# Altium PCB PCB1.PcbDoc
Units mm, origin at the board's own origin, x right, y up, seen from the top; angles counter-clockwise.
Board outline 68.58 x 74.8 mm, 2 copper layers (Top Layer, Bottom Layer); 36 components, 27 nets, 122 pads, 6 vias.
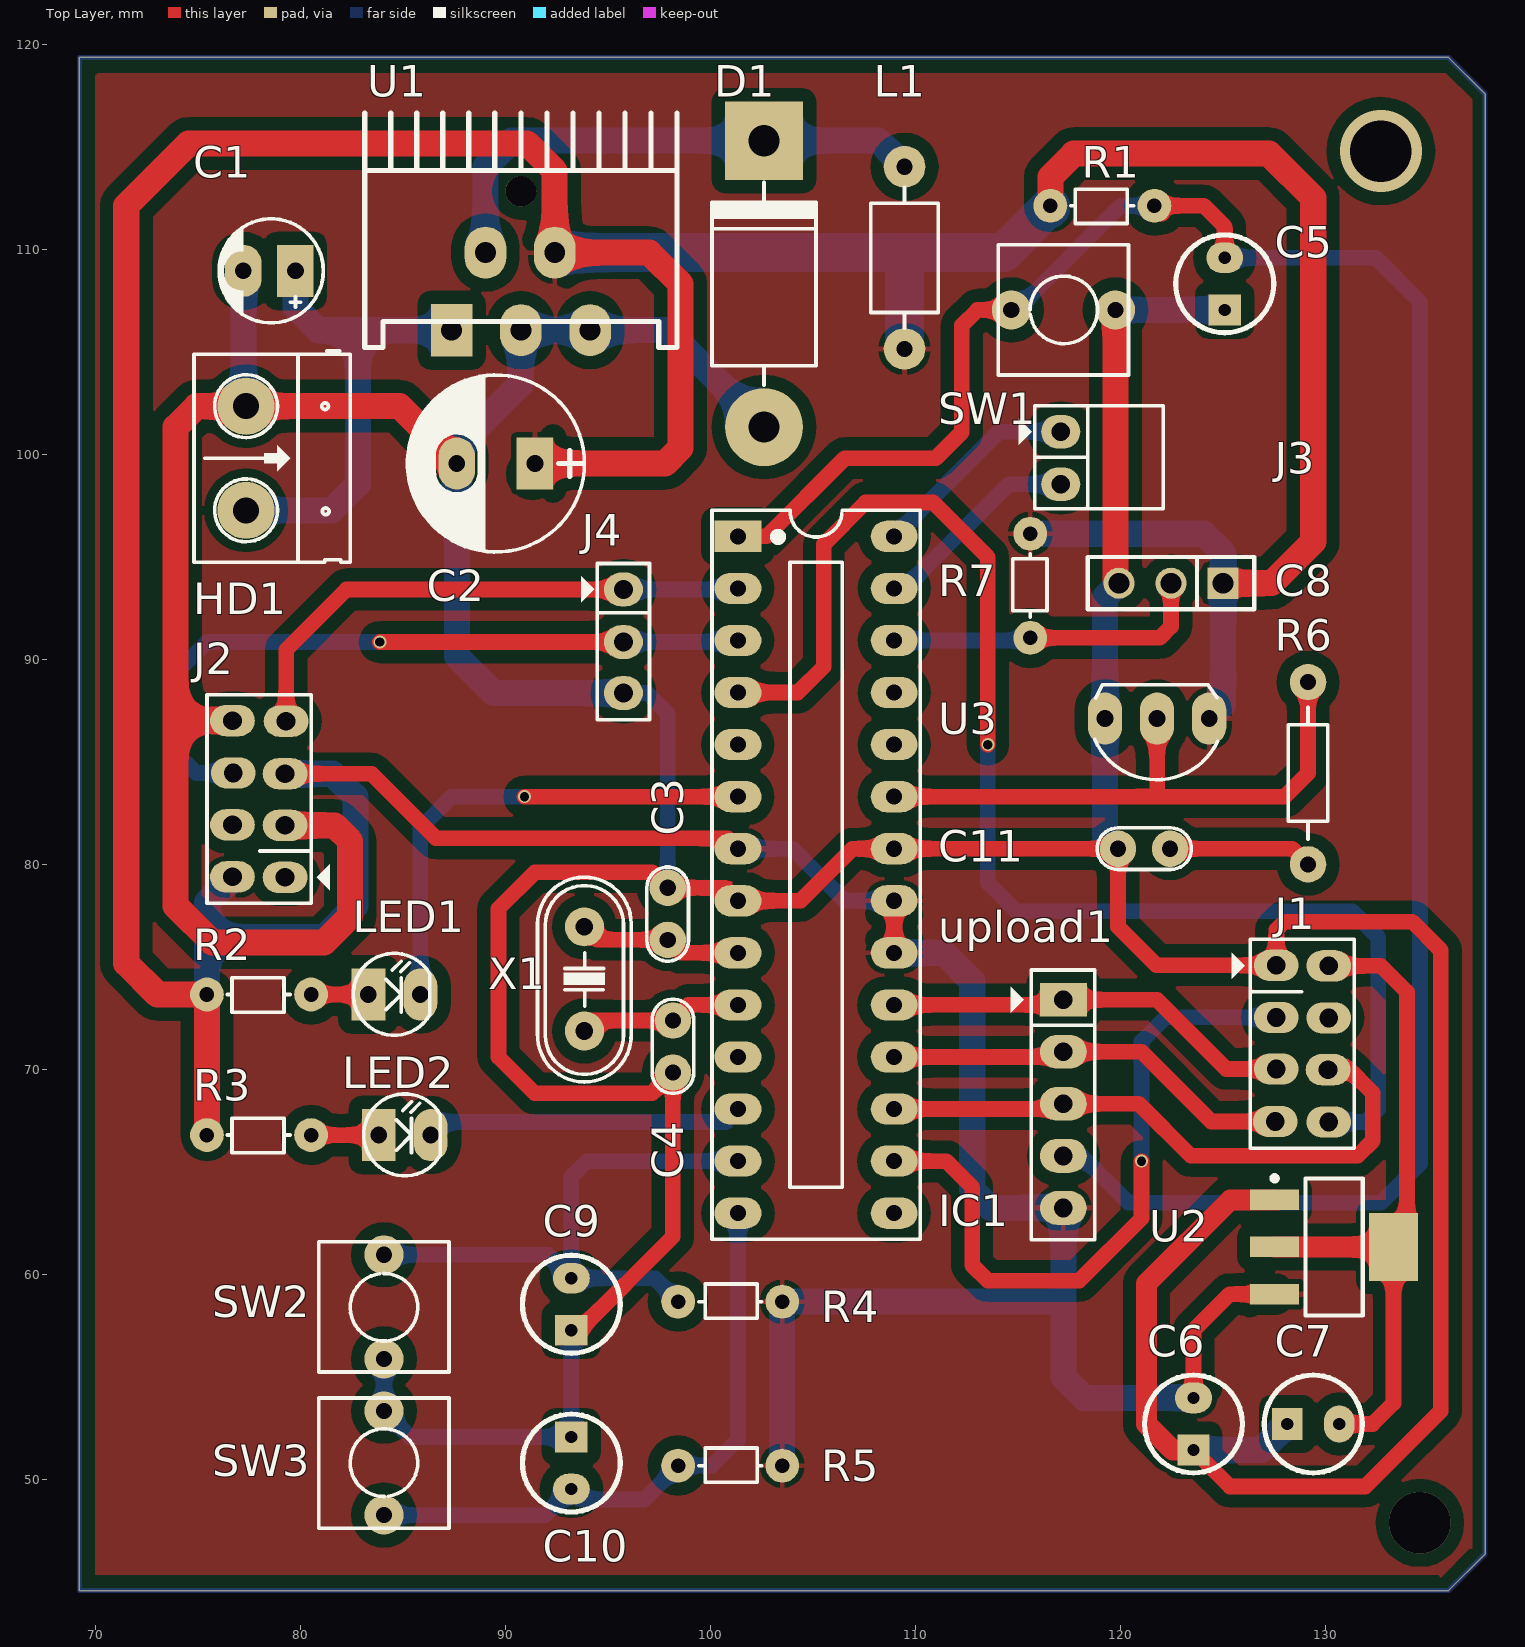
[diagram p0: Top Layer view]
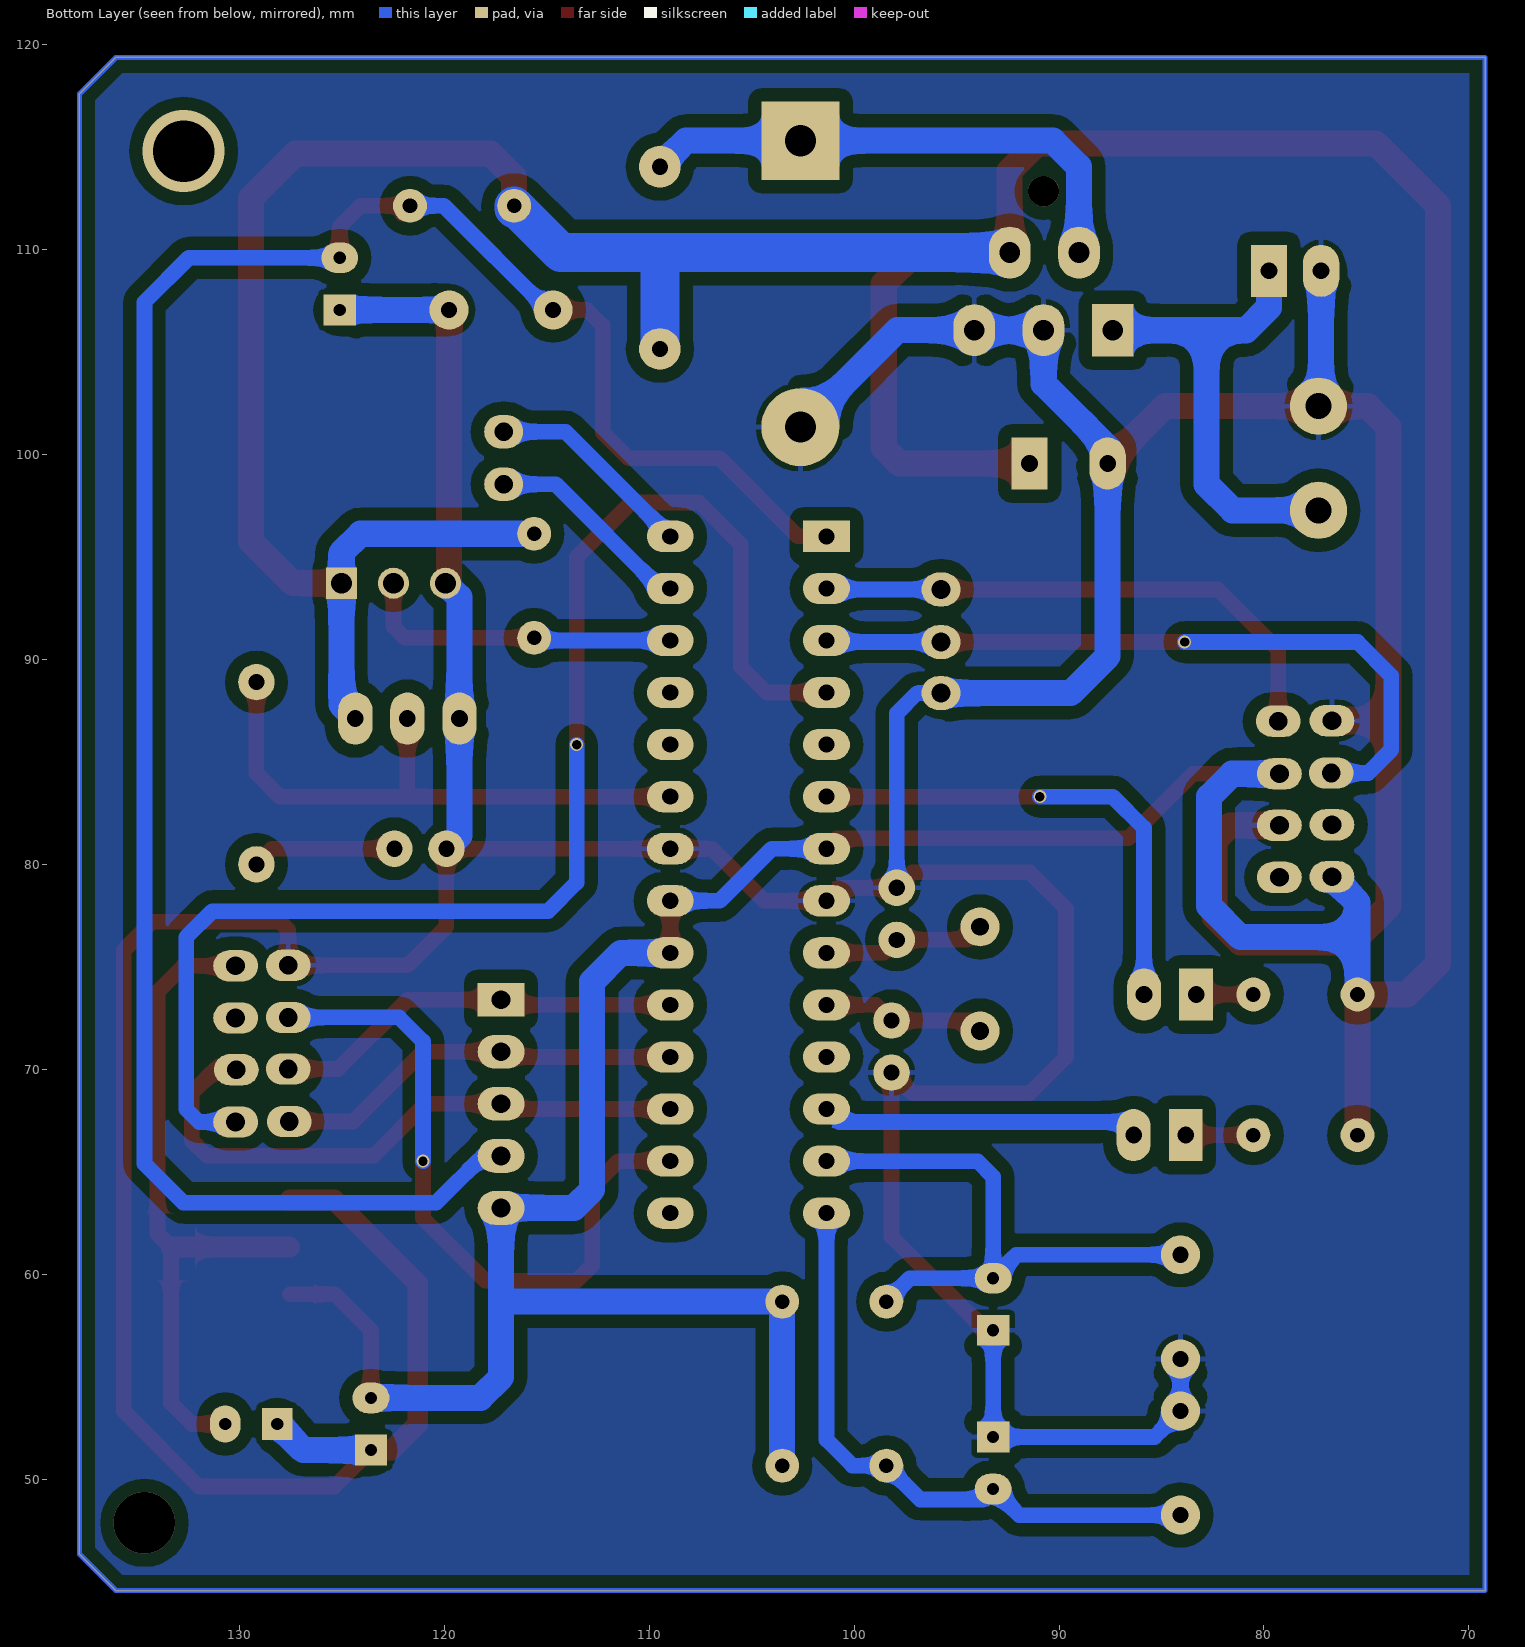
[diagram p1: Bottom Layer view, seen from below]
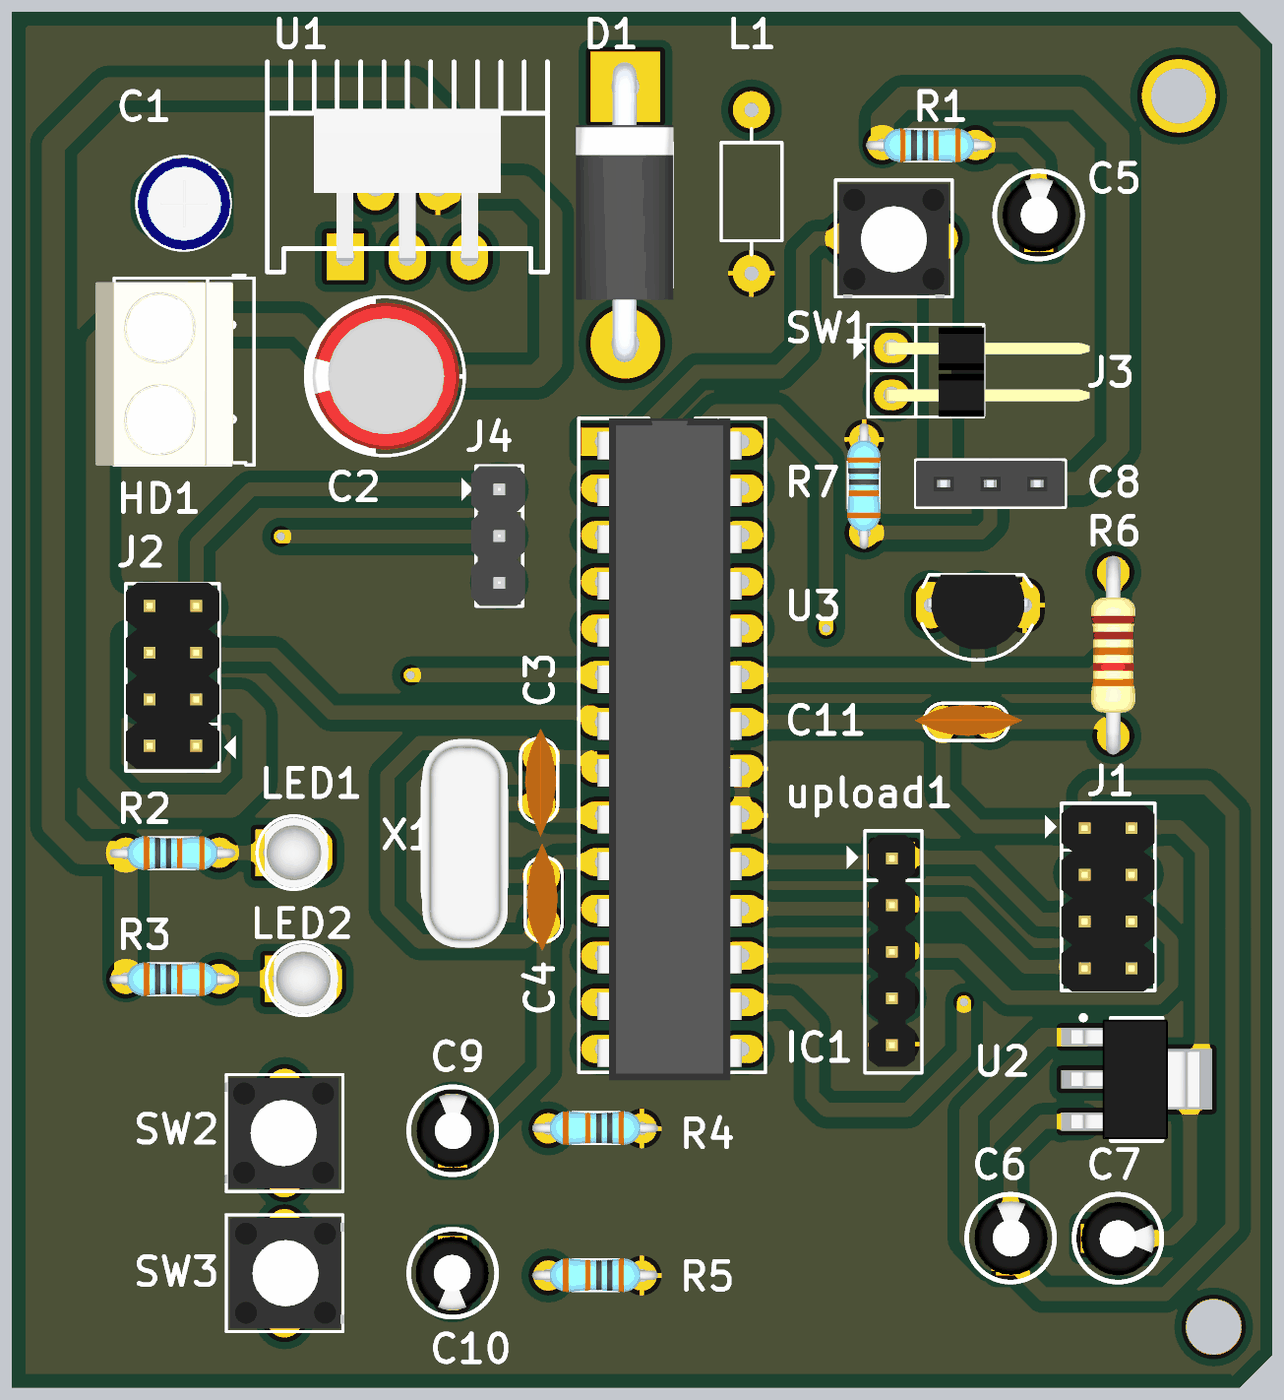
[diagram p2: 3D render of the assembled board from above, using the file's embedded part models]

## Layer stack, top to bottom
Top Solder: solder mask 0.0102, Solder Resist, Dk 3.5
Top Layer: signal copper 0.0356
Dielectric 1: dielectric 0.32, FR-4, Dk 4.8
Bottom Layer: signal copper 0.0356
Bottom Solder: solder mask 0.0102, Solder Resist, Dk 3.5

## Board outline
69.215,44.577 69.215,119.38 136.017,119.38 137.795,117.602 137.795,46.355 136.017,44.577

## Design rules (kind name [scope] priority, off if disabled: settings)
Clearance [All] p1: gap=0.635 ignorepadtopadclearanceinfootprint=FALSE
PlaneConnect [All] p1: planeconnectstyle=Relief reliefexpansion=0.508 reliefentries=4 reliefconductorwidth=0.254 reliefairgap=0.508
PolygonConnect [All] p1: connectstyle=Relief reliefconductorwidth=0.254 reliefentries=4 polygonreliefangle="90 Angle" airgapwidth=0.254
RoutingVias [All] p1: holewidth=0.635 width=0.762 viastyle="Through Hole" minholewidth=0.381 minwidth=0.508 maxholewidth=0.457 maxwidth=0.635
SolderMaskExpansion [All] p1: expansion=0.254
Width [All] p1: maxlimit=3.81 minlimit=0.508 preferedwidth=0.762
29 further rules are at their usual default settings.

## Components (designator, comment, footprint, x,y, rotation, side; value= is the part's Value field where it differs from the comment)
C1 "10uF" CP1/2 79.756,108.966 r180 top value=10uF/50V
C2 "1000uF/16V" CP1.5/3.4 91.44,99.568 r180 top
C3 "100pF" CN1 97.917,78.867 r270 top
C4 "100pF" CN1 98.171,69.85 r90 top
C5 "Cap" C3MM 125.095,108.331 r90 top value=0.1uF
C6 "Cap" C3MM 123.571,52.705 r90 top value=0.1uF
C7 "Cap" C3MM 129.413,52.705 r0 top value=0.1uF
C8 "JP3" JP3-C1T 125.013,93.726 r180 top
C9 "Cap" C3MM 93.218,58.547 r90 top value=0.1uF
C10 "Cap" C3MM 93.218,50.8 r270 top value=0.1uF
C11 "100pF" CN1 119.888,80.772 r0 top
D1 "1N5822" D5A 102.616,115.316 r270 top value="Diode c?m 1N5408"
HD1 "Header 2" HED2 77.343,102.362 r270 top
IC1 "ATmega8-L" DIP28/W0.3 101.346,96.012 r270 top
J1 "Connector 4x2" JP4x2 128.867,71.26 r270 top
J2 "Connector 4x2" JP4x2 77.991,83.198 r90 top
J3 "Jumper 2" jp2h 117.094,101.117 r270 top value="JP 2"
J4 "Jumper 3" JP3 95.758,90.881 r270 top value=J3
L1 "100mH" L/0.4 109.474,114.046 r270 top value="150 mH"
LED1 "LED" LED-3 83.312,73.66 r0 top value="LED 3 ly Single Colour"
LED2 "LED" LED-3 83.82,66.802 r0 top value="LED 3 ly Single Colour"
R1 "10k" R1/8W 119.126,112.141 r180 top value="R1/4W - 1K"
R2 "10k" R1/8W 77.978,73.66 r180 top value="R1/4W - 1K"
R3 "10k" R1/8W 77.978,66.802 r180 top value="R1/4W - 1K"
R4 "10k" R1/8W 100.965,58.674 r0 top value="R1/4W - 1K"
R5 "10k" R1/8W 100.965,50.673 r0 top value="R1/4W - 1K"
R6 "1k" R1/4W 129.159,80.01 r90 top value="R1/4W - 1K"
R7 "4.7k" R1/8W 115.608,93.599 r90 top value="R1/4W - 1K"
SW1 "SW" SW2 119.761,107.061 r180 top value="SW chip 2 pin"
SW2 "SW" SW2 84.074,55.88 r90 top value="SW chip 2 pin"
SW3 "SW" SW2 84.074,53.34 r270 top value="SW chip 2 pin"
U1 "LM2576T-5.0" LM2576t 90.729,110.312 r0 top
U2 "AMS1117" SOT223 130.429,61.341 r270 top
U3 "LM35" QTO-92 121.793,87.122 r180 top
upload1 "JP5" JP5 117.221,73.406 r270 top
X1 "4Mhz" XT2 93.853,74.422 r90 top

## Footprints (in the part's own frame and the unit in brackets; to place one, negate y for a bottom-side part, rotate by r counter-clockwise, add the part's x,y. Pads: shape width x height; smd on the part's side, far side on the other; paste and mask are expansions set on the pad)
C3MM [mm]
  rect 1.5x1.58 hole 0.6: 1(-1.27,0)
  oval 1.5x1.8 hole 0.6: 2(1.27,0)
  silkscreen extent -2.39,-2.39 2.39,2.39, body extent -2,-2.03 1.99,1.97, height 7.01
CN1 [mil]
  round 70 hole 31: 1(0,0) 2(100,0)
  silkscreen extent -40,-40 141,40, body extent -60,-30 170,37, height 265
CP1.5/3.4 [mil] "Tu hoa 220->470uF,16V, 470uF/16V,25V"
  rect 70x100 hole 32: 1(0,0)
  oval 70x100 hole 32: 2(150,0)
  silkscreen extent -95,-170 245,170, body extent -85,-157 230,157, height 446
CP1/2 [mil] "Tu hoa < 22uF/16>50V"
  rect 70x100 hole 32: 1(0,0)
  oval 70x100 hole 32: 2(100,0)
  silkscreen extent -53,-100 147,100, body extent -54,-99 144,100, height 296
D5A [mil] "Diode 5A, W 200mil, L 550mil"
  round 150 hole 60: 1(550,0)
  rect 150x150 hole 60: 2(0,0)
  silkscreen extent 80,-100 470,100, body extent -52,-106 590,103, height 254
DIP28/W0.3 [mil] "28 PIN, W 300mil, Pin to pin 100mil"
  rect 60x90 hole 31: 1(0,0)
  oval 60x90 hole 31: 2(100,0) 3(200,0) 4(300,0) 5(400,0) 6(500,0) 7(600,0) 8(700,0) 9(800,0) 10(900,0) 11(1000,0) 12(1100,0) 13(1200,0) 14(1300,0) 15(1300,300) 16(1200,300) 17(1100,300) 18(1000,300) 19(900,300) 20(800,300) 21(700,300) 22(600,300) 23(500,300) 24(400,300) 25(300,300) 26(200,300) 27(100,300) 28(0,300)
  silkscreen extent -50,-50 1350,350, body extent -50,-10 1367,300, height 200
HED2 [mil] "Header 2, 2 pin, hight 300mil, Pin to Pin 200, Colour Green"
  round 110 hole 50: 1(0,0) 2(200,0)
  silkscreen extent -106,-100 300,200, body extent -92,-140 302,155, height 394
jp2h [mil]
  oval 65x75 hole 36: 1(0,0) 2(101,0)
  silkscreen extent -50,-81 148,197, body extent -44,-14 148,424, height 99
JP3 [mil] "Jumper 3"
  oval 65x75 hole 36: 1(-100,0) 2(1,0) 3(99,0)
  silkscreen extent -150,-81 150,50, body extent -150,-60 150,55, height 355
JP3-C1T [mm] "3 row, straight, gold plating"
  rect 1.52x1.52 hole 1.02: 1(0,0)
  round 1.52 hole 1.02: 2(2.54,0) 3(5.08,0)
  silkscreen extent -1.52,-1.27 6.6,1.27, body extent -1.52,-1.25 6.6,1.25, height 8.51
JP4x2 [mil] "Connector 4x2"
  oval 60x86 hole 36: 1(-150.5,-49.5) 2(-50.5,-49.5) 3(48.5,-49.5) 4(149.5,-51.5) 5(-149.5,51.5) 6(-49.5,51.5) 7(50,50) 8(150.5,51.5)
  silkscreen extent -201,-135 201,101, body extent -197,-100 203,100, height 335
JP5 [mil] "JP5"
  rect 65x90 hole 36: 1(0,0)
  oval 65x90 hole 36: 2(100,0) 3(200,0) 4(300,0) 5(400,0)
  silkscreen extent -57,-101 461,60, body extent -48,-53 448,45, height 323
L/0.4 [mil] "Inductor , 2 Pin, L 350mil, W 150 mil"
  round 80 hole 31: 1(0,0) 2(350,0)
  silkscreen extent 40,-65 310,65
LED-3 [mil] "LED 2 PIN, 3ly Only colour"
  rect 65x100 hole 32: 1(0,0)
  oval 65x100 hole 32: 2(100,0)
  silkscreen extent -29,-78 118,79, body extent -13,-75 125,75, height 217
LM2576t [mil]
  rect 80x100 hole 40: 1(-132,-167.09)
  oval 80x100 hole 40: 2(-67,-18) 3(1,-167) 4(66,-18) 5(134,-167)
  round 59.06 hole 59.06: ""(1,100)
  silkscreen extent -299,-200 301,250, body extent -199,-175 201,150, height 859
QTO-92 [mil] "TO-92"
  oval 66x100 hole 32: 1(-100,0) 2(0,0) 3(100,0)
  silkscreen extent -117,-65 120,118, body extent -109,-66 109,95, height 245
R1/4W [mil] "R 1/4W, 2 Pin, 350mil"
  round 70 hole 31: 1(0,0) 2(350,0)
  silkscreen extent 48,-38 302,38, body extent -40,-47 386,47, height 111
R1/8W [mil] "R 1/8W, 2 pin, 300mil"
  round 65 hole 28: 1(-100,0) 2(100,0)
  silkscreen extent -60,-32 61,34, body extent -135,-35 135,37, height 86
SOT223 [mm]
  rect 1x2.4 smd: 1(-2.3,-2.9) 2(0,-2.9) 3(2.3,-2.9)
  rect 3.3x2.4 smd: 4(0,2.9)
  silkscreen extent -3.47,-3.02 3.35,1.4, body extent -3.25,-3.56 3.25,3.4, height 1.68
SW2 [mil] "SW button 2pin, 250x 250 mil"
  round 75 hole 31: 1(0,0) 2(200,0)
  silkscreen extent -25,-125 225,125, body extent -18,-116 218,128, height 197
XT2 [mil] "Footpin for Crystal 2 pin"
  round 75 hole 34: 1(-100,0) 2(100,0)
  silkscreen extent -198,-90 195,90, body extent -233,-93 213,90, height 138

## Part data
C1: library part CP0, "Cap P  0,1uF < 22uF , 16 - 50V", Description 1="10 => 220uF/6,3V/10V - 10uF => 100uF/16V", Description 2="0,1uF => 33uF/50V - 10uF => 22uF/63V", Description 3="0,47uF => 10uF/100V"
C2: library part CP4, "Cap 1000uF/16V - 220uF/50V", Description 1="2200uF-3300uF/6,3V - 1000uF-2200uF/10V", Description 2="1000uF/16V - 470uF => 1000uF/25V - 100uF/100V", Description 3=330uF>470uF/35V_220uF>470uF/50V_10uF>22uF/250V, Description 4="220uF => 330uF/63V - 10uF =>33uF/160 - 200V", Description 5="4,7uF>10uF/250V_3,3uF>10uF/400V - 2,2uF>4,7uF/450V"
C3 C4 C11: library part CN1, "Cap np  1pF - 472pF"
C5 C6 C7 C9 C10: "Capacitor", LatestRevisionDate=17-Jul-2002, LatestRevisionNote="Re-released for DXP Platform.", PackageReference=RAD-0.3, Published=8-Jun-2000, Publisher="Altium Limited"
C8: "WR-PHD 2.54 mm Angled Socket Header", Manufacturer="Würth Elektronik eiSos GmbH", partNo=613003143121, ComponentLink1 Description=Manufacturer, ComponentLink1URL=http://www.we-online.com, ComponentLink2 Description=Datasheet, ComponentLink2URL=http://katalog.we-online.de/em/datasheet/6130xx143121.pdf, Created by="Karrer Zheng", Created Date="29 March 2013", NoPins=03
D1: "Schottky Rectifiers"
HD1: library part Hed2, "Header 2 (Green)"
IC1: "8-Bit AVR Microcontroller with 8K Bytes of In-System Programmable Flash Memory"
J1 J2: library part JP4x2
J3: library part "JP 2"
J4: library part JP3
L1: library part L1, "Inductor"
LED1 LED2: "LED Single colour Green and Red"
R1 R2 R3 R4 R5 R7: library part R, "Resistor 1/4W"
R6: library part R1/4W, "Resistor 1/4W"
SW1 SW2 SW3: library part SW2, "Switch button 2 pin"
U1: "SIMPLE SWITCHER; 3A Step-Down Voltage Regulator", DigiKeyPartNumber=LM2576T-5.0-ND, Manufacturer="National Semiconductor", PackageTopMarking="NSUZXYTT*LM2576T*-5.0 P+", PowerWise=N, Code_JEDEC=TO-220-AB, ComponentLink1Description="LM2576 Datasheet", ComponentLink1URL=http://www.national.com/ds/LM/LM2576.pdf, ComponentLink2Description="LM2576 Web Page", ComponentLink2URL=http://www.national.com/pf/LM/LM2576.html, ComponentLink3Description="T05A Package Page", ComponentLink3URL=http://www.national.com/packaging/folders/t05a.html, CompType=Switcher, DatasheetVersion=Aug-2004, FirstPublished=4-Dec-2008, PackageDescription="TO-220, Molded, 5 Lead, Straight", PackageReference=T05A, PackageVersion="revJ, Jan-1992", PartNumber=LM2576T-5.0, PinCount=5, Publisher="Altium Limited", RoHS=O
U2: library part AMS117
U3: "Teminal"
X1: library part XT2, "Crystal For all Crystal 2pin."

## Via types
v1: diameter 0.635, hole 0.457, Top Layer to Bottom Layer, 4 vias
v2: diameter 4, hole 3, Top Layer to Bottom Layer, 1 vias
v3: diameter 3, hole 3, Top Layer to Bottom Layer, 1 vias

## Nets (pads, with @x,y where several pads share a name; then routed paths per layer and width w, separated by ;. In a path a pad name is that pad's centre, name@x,y a point inside that pad or via, vN(x,y) a via of type N, cw(c..) or ccw(c..) an arc to the next point about the centre after c; other vN are vias at no path point)
3v3: C7.2 J1.5 U2.2 U2.4 | length 33.5
  Top Layer w0.762: J1.5 132.715,75.057 133.985,73.787 133.985,61.997 U2.4 133.329,53.725 132.309,52.705 C7.2
  Top Layer w1.016: U2.2 U2.4
5v: C2.1 C6.2 C8.1 IC1.7 IC1.20 IC1.21 J2.3 J2.5 L1.2 R1.2 R2.2 R3.2 R4.2 R5.2 R7.2 U1.4 U2.3 U3.1 upload1.5 | length 305.8
  Top Layer w0.762: J2.3 83.464,84.43 86.614,81.28 100.838,81.28 IC1.7 ; IC1.20 IC1.21 ; C6.2 123.571,57.277 125.335,59.041 U2.3
  Top Layer w1.27: R3.2 R2.2 73.025,73.66 71.501,75.184 71.501,112.141 74.549,115.189 91.059,115.189 92.405,113.843 U1.4 97.028,109.855 98.552,108.331 98.552,100.33 97.79,99.568 91.821,99.568 C2.1@91.313,99.06 ; R1.2 116.586,113.538 117.729,114.681 127.254,114.681 129.413,112.522 129.413,95.758 127.381,93.726 C8.1
  Bottom Layer w0.762: IC1.7 104.013,80.772 106.553,78.232 IC1.21
  Bottom Layer w1.27: R2.2 75.438,76.454 ; J2.5 75.438,78.156 75.438,76.454 ; J2.3 81.559,84.43 82.677,83.312 82.677,77.978 81.153,76.454 75.438,76.454 ; R5.2 R4.2 116.967,58.674 117.221,58.928 ; IC1.20 111.379,75.692 112.776,74.295 112.776,64.135 113.665,63.246 upload1.5 117.221,58.928 ; R7.2 124.079,96.139 125.013,95.205 C8.1 125.013,87.802 U3.1 ; C6.2 118.237,53.975 117.221,54.991 117.221,58.928
  Bottom Layer w1.905: U1.4 109.347,109.855 ; L1.2 109.474,109.728 109.347,109.855 ; R1.2@116.586,112.014 R1.2 114.3,109.855 109.347,109.855
CE: IC1.16 J1.2 | length 33.7
  Top Layer w0.762: IC1.16 111.506,65.532 112.776,64.262 112.776,60.452 113.538,59.69 117.983,59.69 121.031,62.738 v1(121.031,65.532)
  Bottom Layer w0.762: v1(121.031,65.532) 121.031,71.374 122.199,72.542 J1.2
CSN: J1.6
DATA_11: C8.2 IC1.26 R7.1 | length 16.1
  Top Layer w0.762: IC1.26 IC1.26@109.093,91.059 ; R7.1 121.92,91.059 122.473,91.612 C8.2
  Bottom Layer w0.762: IC1.26 115.481,90.932 R7.1
GND: C1.2 C2.2 C3.1 C4.1 C5.1 C6.1 C7.1 C8.3 C9.1 C10.1 C11.1 D1.1 HD1.1 IC1.8 IC1.22 J1.1 J2.2 J2.8 J4.3 SW1.1 SW2.1 SW3.1 U1.3 U1.5 U2.1 U3.3 | length 312.8
  Top Layer w0.762: C9.1 93.599,57.277 98.171,61.849 C4.1 97.155,68.834 91.44,68.834 89.662,70.612 89.662,77.851 91.44,79.629 97.155,79.629 C3.1 100.711,78.867 IC1.8 104.394,78.232 106.934,80.772 IC1.22 C11.1 119.888,76.962 121.768,75.082 J1.1 127.61,76.81 128.016,77.216 134.239,77.216 135.636,75.819 135.636,53.34 131.953,49.657 125.349,49.657 C6.1 ; U2.1 U2.1@127.67,63.5
  Top Layer w1.016: C6.1 122.555,51.435 121.285,52.705 121.285,59.563 125.363,63.641 U2.1
  Top Layer w1.27: J2.8 73.914,87.02 ; J2.2 81.661,81.915 82.423,81.153 82.423,77.47 81.153,76.2 75.692,76.2 73.914,77.978 73.914,87.02 ; C2.2 84.836,102.362 HD1.1 74.93,102.362 73.914,101.346 73.914,87.02 ; SW1.1 119.761,93.898 C8.3
  Bottom Layer w0.762: SW2.1 SW3.1 85.344,52.07 C10.1 C9.1 ; J4.3 96.926,88.367 97.917,87.376 C3.1 ; C8.3@119.761,93.898 C8.3
  Bottom Layer w1.27: C1.2 77.216,102.489 HD1.1 ; C2.2@87.503,99.568 87.503,100.203 90.754,103.454 U1.3 U1.5 97.892,106.07 D1.1 ; C2.2 87.63,90.17 89.433,88.367 J4.3 ; SW1.1 C5.1 ; C11.1 119.253,81.407 U3.3 119.253,93.046 C8.3 ; C6.1 126.873,51.435 C7.1
IRQ: IC1.4 J1.8 | length 67.7
  Top Layer w0.762: IC1.4 104.267,88.392 105.537,89.662 105.537,95.631 107.569,97.663 110.871,97.663 113.538,94.996 v1(113.538,85.852)
  Bottom Layer w0.762: v1(113.538,85.852) 113.538,79.121 114.935,77.724 131.318,77.724 132.588,76.454 132.588,68.072 131.953,67.437 J1.8
LED1: IC1.6 LED1.2 | length 24.3
  Top Layer w0.762: v1(90.932,83.312) IC1.6
  Bottom Layer w0.762: LED1.2 85.852,81.788 87.376,83.312 v1(90.932,83.312)
LED2: IC1.12 LED2.2 | length 15.5
  Bottom Layer w0.762: LED2.2 86.995,67.437 100.711,67.437 IC1.12
LM35: IC1.23 R6.2 U3.2 | length 29
  Top Layer w0.762: IC1.23 121.666,83.312 ; U3.2 121.793,83.439 121.666,83.312 ; R6.2 129.159,84.455 128.016,83.312 121.666,83.312
MISO: IC1.18 J1.4 upload1.2 | length 20.1
  Top Layer w0.762: IC1.18 116.967,70.612 upload1.2 121.031,70.866 124.435,67.462 J1.4
MOSI: IC1.17 J1.7 upload1.3 | length 29.8
  Top Layer w0.762: IC1.17 116.967,68.072 upload1.3 120.904,68.326 123.444,65.786 131.572,65.786 132.313,66.527 132.313,68.855 131.178,69.99 J1.7
NetC1_1: C1.1 HD1.2 U1.1 | length 23.4
  Bottom Layer w1.27: HD1.2 81.534,97.282 82.804,98.552 82.804,106.068 ; C1.1 79.756,107.188 80.876,106.068 82.804,106.068 ; U1.1@87.353,106.045 U1.1 82.804,106.068
NetC3_2: C3.2 IC1.9 X1.2 | length 8
  Top Layer w0.762: X1.2 94.488,76.327 C3.2 98.552,75.692 IC1.9
NetC4_2: C4.2 IC1.10 X1.1 | length 8
  Top Layer w0.762: X1.1 94.361,72.39 C4.2 98.933,73.152 IC1.10
NetC5_2: C5.2 IC1.1 R1.1 SW1.2 upload1.4 | length 107.6
  Top Layer w0.762: IC1.1 102.743,96.012 106.553,99.822 110.998,99.822 112.268,101.092 112.268,106.299 113.03,107.061 SW1.2 ; R1.1@122.047,111.76 R1.1 124.079,112.141 125.095,111.125 C5.2
  Bottom Layer w0.762: SW1.2 114.935,107.061 120.015,112.141 R1.1 ; upload1.4 118.11,65.786 120.396,63.5 132.715,63.5 134.62,65.405 134.62,107.442 132.461,109.601 C5.2
NetC11_2: C11.2 R6.1 | length 7
  Top Layer w0.762: C11.2 128.397,80.772 R6.1
NetD1_2: D1.2 L1.1 U1.2 | length 25.7
  Bottom Layer w1.27: U1.2 89.027,114.046 90.297,115.316 D1.2 108.204,115.316 L1.1
NetLED1_1: LED1.1 R2.1 | length 3
  Top Layer w0.762: R2.1 LED1.1@83.185,73.66 ; LED1.1 LED1.1@83.185,73.66 ; LED1.1@83.312,73.787 LED1.1@83.185,73.66
NetLED2_1: LED2.1 R3.1 | length 3.5
  Top Layer w0.762: R3.1 LED2.1@83.693,66.802 ; LED2.1@83.82,66.675 LED2.1@83.693,66.802 ; LED2.1 LED2.1@83.693,66.802
PB0: C10.2 IC1.14 R5.1 SW3.2 | length 30.3
  Bottom Layer w0.762: SW3.2 91.948,48.26 C10.2 93.726,49.022 96.774,49.022 R5.1 100.076,50.673 101.346,51.943 IC1.14
PD7: C9.2 IC1.13 R4.1 SW2.2 | length 28.7
  Bottom Layer w0.762: SW2.2 92.075,60.96 C9.2 ; R4.1 97.282,59.817 C9.2 ; IC1.13 93.98,65.532 93.218,64.77 C9.2
RF433_rx: IC1.2 J2.4 J4.1 | length 26.9
  Top Layer w0.762: J2.4 79.299,90.475 82.245,93.421 J4.1 J4.1@95.733,93.447 ; IC1.2@101.244,93.37 IC1.2
  Bottom Layer w0.762: J4.1 101.295,93.421 IC1.2
RF433_tx: IC1.3 J2.7 J4.2 | length 35.5
  Top Layer w0.762: v1(83.871,90.856) J4.2 ; IC1.3@101.219,90.805 IC1.3
  Bottom Layer w0.762: J2.7 74.917,84.468 73.787,85.598 73.787,89.205 75.438,90.856 v1(83.871,90.856) ; J4.2 101.27,90.856 IC1.3
SCK: IC1.19 J1.3 upload1.1 | length 20.1
  Top Layer w0.762: IC1.19 116.967,73.152 upload1.1 121.793,73.406 125.171,70.028 J1.3
SCL: IC1.28 J3.1 | length 10.2
  Bottom Layer w0.762: IC1.28 114.071,101.117 J3.1
SDA: IC1.27 J3.2 | length 10.2
  Bottom Layer w0.762: IC1.27 109.474,93.472 114.554,98.552 J3.2
pads on no net: IC1.5 IC1.11 IC1.15 IC1.24 IC1.25 J2.1 J2.6 U1.
copper on no net: | length 284.7
  Bottom Layer w0.254: 69.215,44.577 69.215,44.704 69.215,119.38 136.017,119.38 137.795,117.602 137.795,46.355 136.017,44.577 69.215,44.577
  other v2: 132.715,114.808
  other v3: 134.62,47.879

## Polygon pours and split planes (outlines as drawn)
GND on Bottom Layer "Bottom Layer-No Net" (solid, pour order 0): 69.469,119.126 135.89,119.126 137.541,117.475 137.541,46.355 135.89,44.704 135.763,44.831 69.469,44.831
5v on Top Layer "Bottom Layer-No Net" (solid, pour order 2): 135.89,118.618 137.16,117.348 137.16,46.609 137.033,46.609 135.636,45.212 135.509,45.339 69.977,45.339 69.977,118.618 70.104,118.618